# Altium PCB Copy yhh.PcbDoc
Units mm, origin at the board's own origin, x right, y up, seen from the top; angles counter-clockwise.
Board outline 100 x 100 mm, 2 copper layers (Top Layer, Bottom Layer), stack 1.571 mm thick; 42 components, 55 nets, 217 pads, 19 vias.
Unrouted connection lines stored in the file: 71.
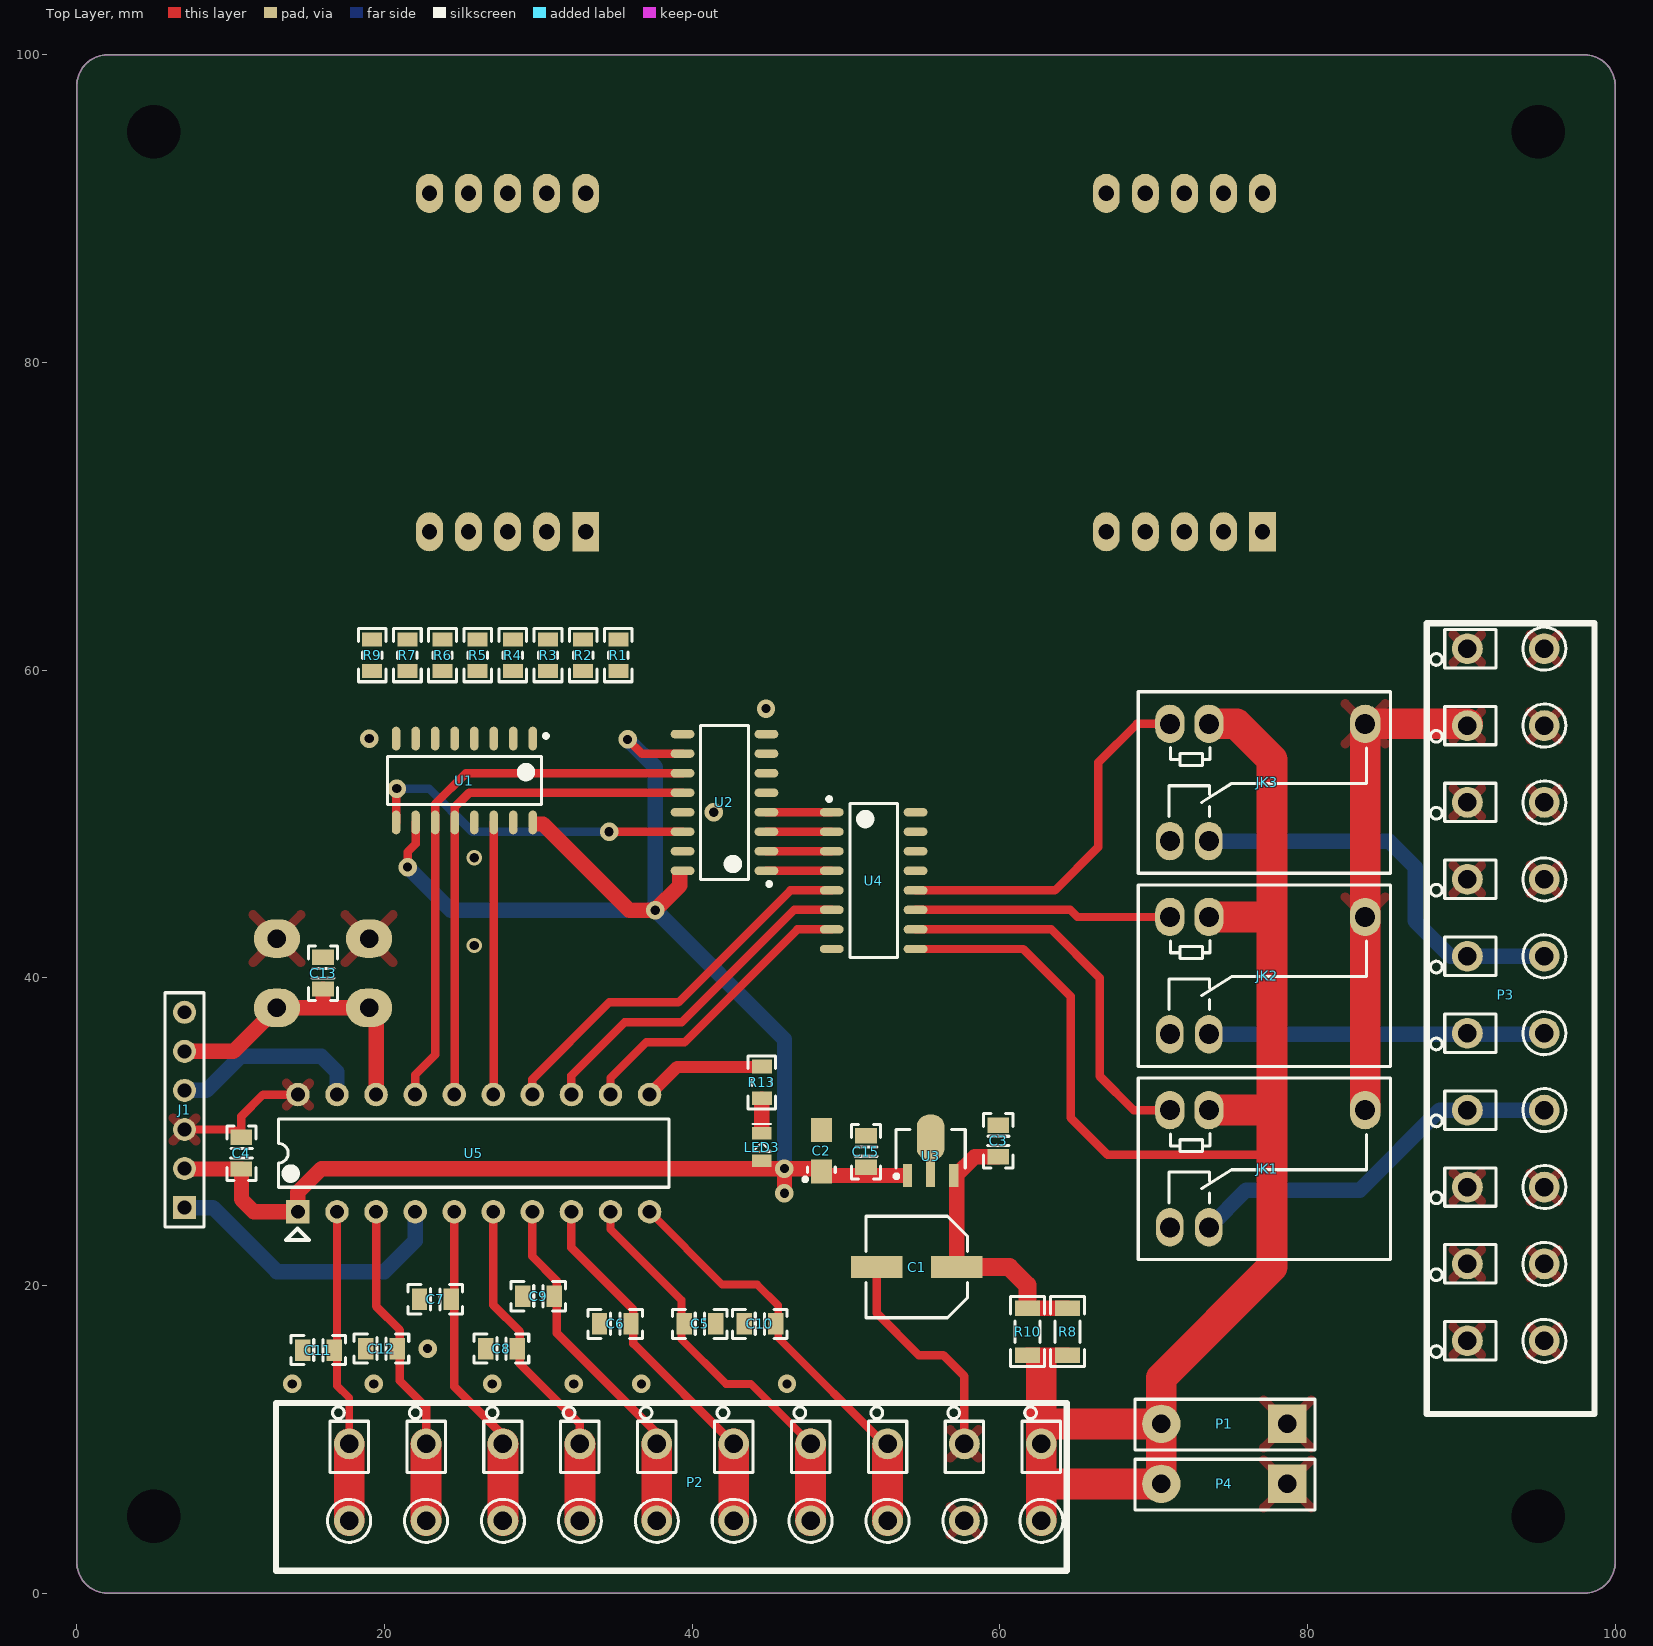
[diagram p0: Top Layer view]
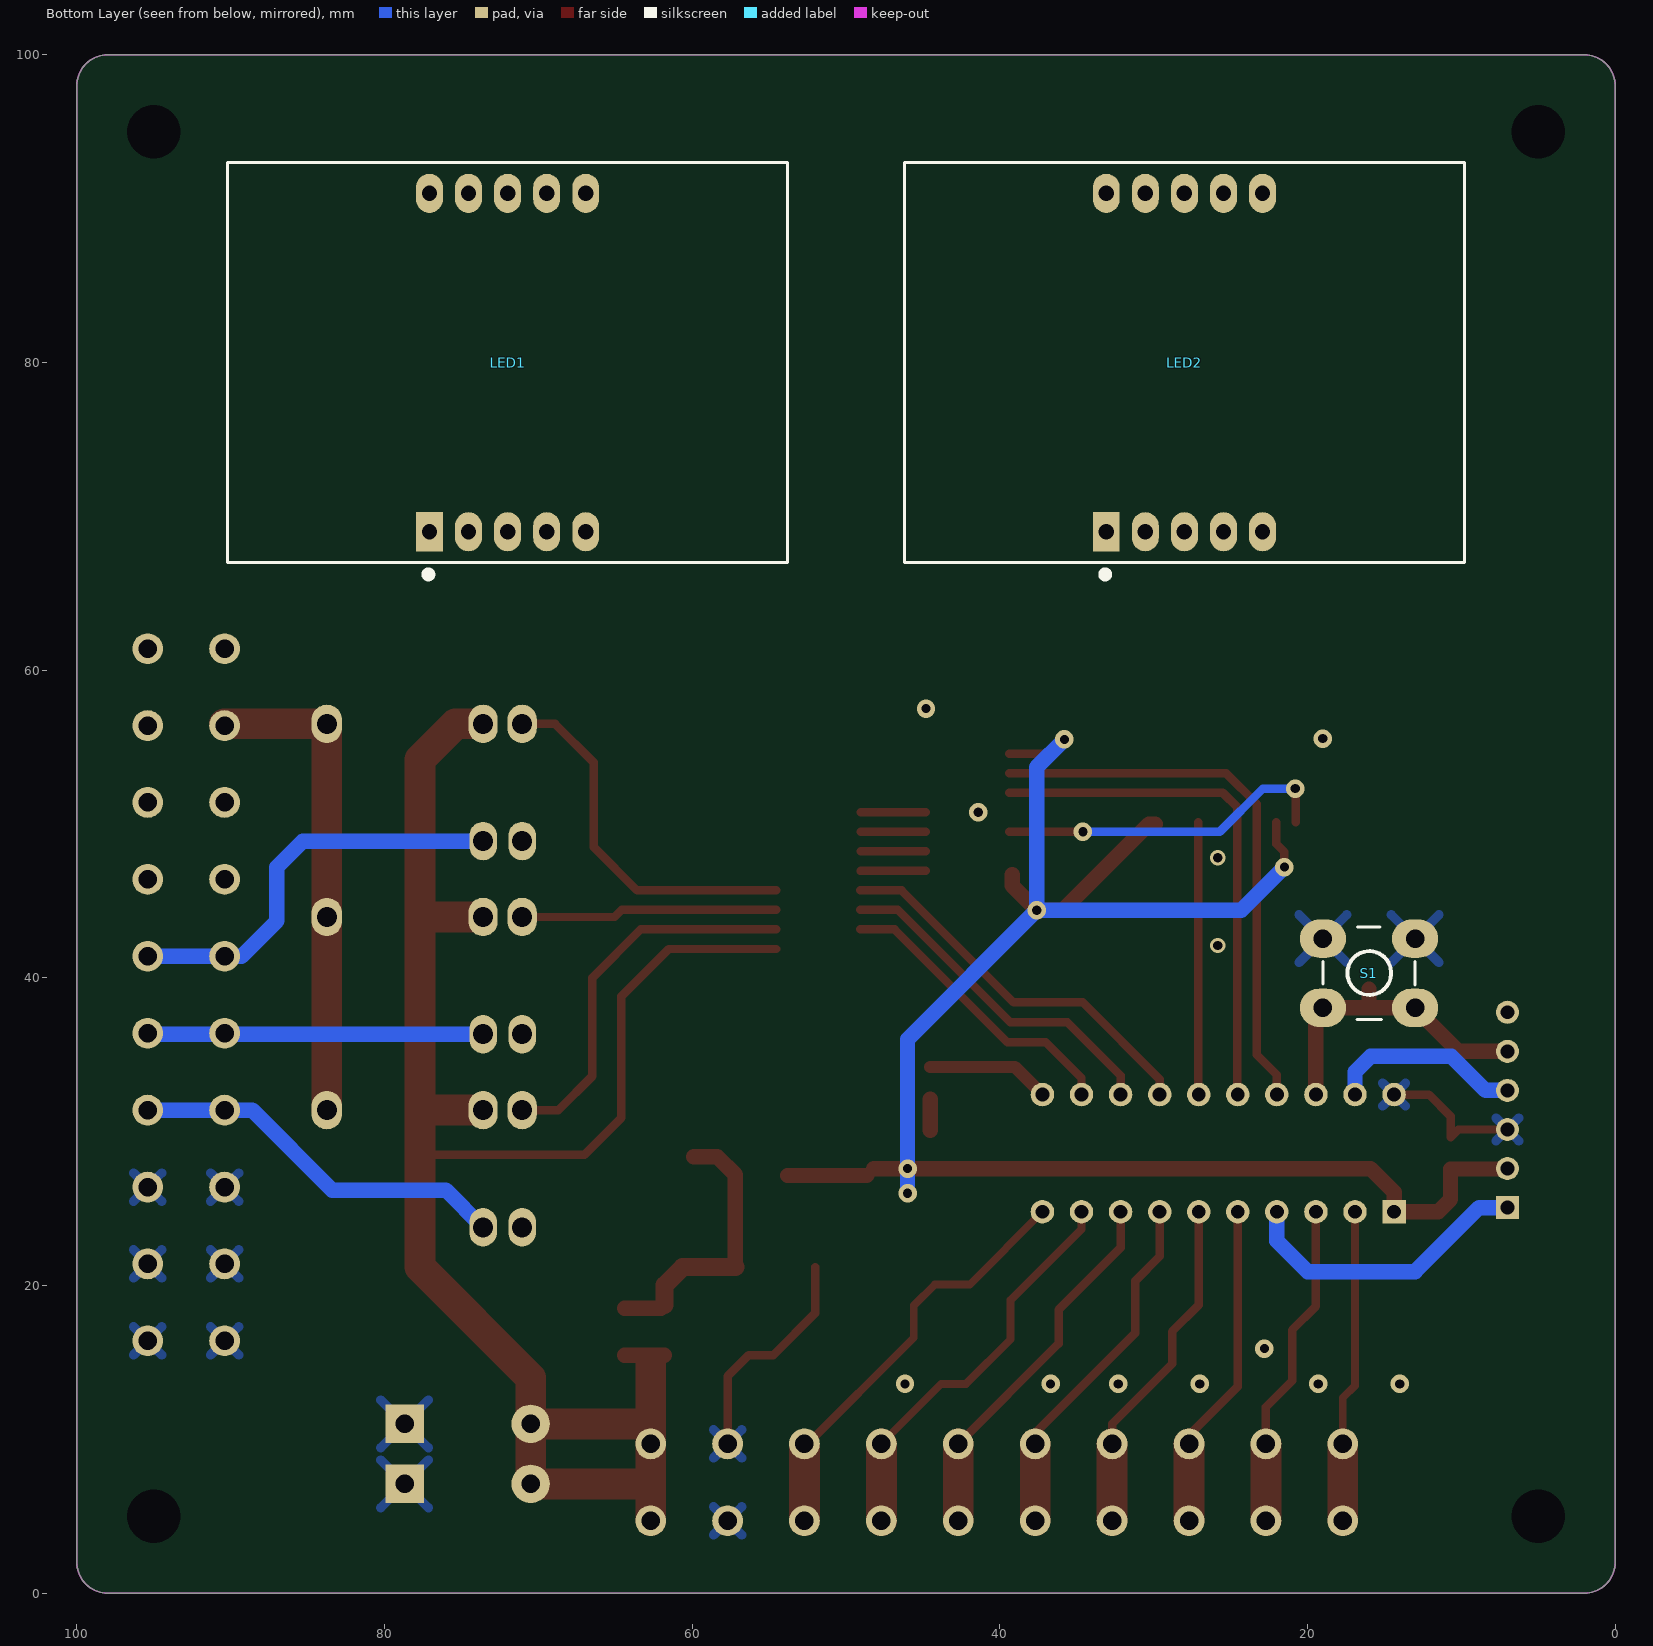
[diagram p1: Bottom Layer view, seen from below]

## Layer stack, top to bottom
Top Solder: solder mask 0.0102, Solder Resist, Dk 3.5
Top Layer: signal copper 0.0356
Dielectric 1: dielectric 1.5, FR-4, Dk 4.8
Bottom Layer: signal copper 0.0356
Bottom Solder: solder mask 0.0102, Solder Resist, Dk 3.5

## Board outline
0,2 0,98 cw(c2,98) 2,100 98,100 cw(c98,98) 100,98 100,2 cw(c98,2) 98,0 2,0 cw(c2,2)

## Design rules (kind name [scope] priority, off if disabled: settings)
Clearance Clearance_2 [IsKeepOut] p1: gap=2 ignorepadtopadclearanceinfootprint=FALSE
Clearance Clearance_1 [HasPad('Free-1')] p2: gap=5 ignorepadtopadclearanceinfootprint=FALSE
Clearance [All] p3: gap=0.6 ignorepadtopadclearanceinfootprint=FALSE
PlaneConnect [All] p1: planeconnectstyle=Relief reliefexpansion=0.5 reliefentries=4 reliefconductorwidth=0.5 reliefairgap=0.3
PolygonConnect [All] p1: thpad.connectstyle=Relief thpad.reliefconductorwidth=0.6 thpad.reliefentries=4 thpad.polygonreliefangle="45 Angle" thpad.airgapwidth=0.3 smdpad.connectstyle=Direct smdpad.reliefconductorwidth=0.5 smdpad.reliefentries=4 smdpad.polygonreliefangle="90 Angle" smdpad.airgapwidth=0.254 via.connectstyle=Direct via.reliefconductorwidth=0.254 via.reliefentries=4 via.polygonreliefangle="90 Angle" via.airgapwidth=0.254
RoutingVias [All] p1: holewidth=0.711 width=1.27 viastyle="Through Hole" minholewidth=0.711 minwidth=1.27 maxholewidth=0.711 maxwidth=1.27
SolderMaskExpansion [All] p1: expansion=0.102
Width [All] p1: maxlimit=5 minlimit=0.5 preferedwidth=0.55
29 further rules are at their usual default settings.

## Components (designator, comment, footprint, x,y, rotation, side; value= is the part's Value field where it differs from the comment)
C1 "Cap Pol" CAL6.3X8 54.6,21.2 r0 top value=100uF
C2 "Cap Pol" TA3216 48.4,28.748 r270 top value=100uF
C3 "0.1uF" C0805(2012) 59.9,29.4 r90 top
C4 "0.1uF" C0805(2012) 10.7,28.6 r90 top
C5 "0.1uF" C0805(2012) 40.5,17.5 r180 top
C6 "0.1uF" C0805(2012) 35,17.5 r180 top
C7 "0.1uF" C0805(2012) 23.3,19.1 r0 top
C8 "0.1uF" C0805(2012) 27.6,15.9 r0 top
C9 "0.1uF" C0805(2012) 30,19.3 r180 top
C10 "0.1uF" C0805(2012) 44.4,17.5 r0 top
C11 "0.1uF" C0805(2012) 15.7,15.8 r180 top
C12 "0.1uF" C0805(2012) 19.8,15.9 r0 top
C13 "0.1uF" C0805(2012) 16,40.3 r90 top
C15 "0.1uF" C0805(2012) 51.3,28.7 r90 top
J1 "ISP" HDR1X6 7,31.41 r90 top
JK1 "SRSZ" RELAY_SRSZ 77.4,27.59 r0 top
JK2 "SRSZ" RELAY_SRSZ 77.4,40.145 r0 top
JK3 "SRSZ" RELAY_SRSZ 77.4,52.7 r0 top
LED1 "Green" LED_KRS-8201CPG-3.5 72,80 r180 bottom
LED2 "Green" LED_KRS-8201CPG-3.5 28,80 r180 bottom
LED3 "LED" LED_0805 44.525,29 r270 top
P1 "Header 2" HDR1X2 74.7,11 r180 top
P2 "Header 10" CON_DEGSON236_5_10P 40.2,7.2 r180 top
P3 "Header 10" CON_DEGSON236_5_10P 92.9,38.9 r270 top
P4 "Header 2" HDR1X2 74.7,7.1 r180 top (schematic designator P1)
R1 "470" R0805(2012) 35.2,60.975 r90 top
R2 "470" R0805(2012) 32.914,60.975 r90 top
R3 "470" R0805(2012) 30.629,60.975 r90 top
R4 "470" R0805(2012) 28.343,60.975 r90 top
R5 "470" R0805(2012) 26.057,60.975 r90 top
R6 "470" R0805(2012) 23.771,60.975 r90 top
R7 "470" R0805(2012) 21.486,60.975 r90 top
R8 "330" R1206(3216) 64.4,17 r90 top
R9 "470" R0805(2012) 19.2,60.975 r90 top
R10 "330" R1206(3216) 61.8,17 r90 top
R13 "1K" R0805(2012) 44.525,33.2 r270 top
S1 "SW-PB4" KEY_6X6 16,40.3 r180 bottom
U1 "74HC595" SOP16 25.195,52.825 r180 top
U2 "74HC595" SOP16 42.1,51.4 r90 top
U3 "LM78L05" SOT89_3L 55.5,27.225 r270 top
U4 "ULN2003L" SOP16 51.8,46.32 r270 top
U5 "PIC16F690-I/P" DIP20 25.8,28.6 r0 top

## Footprints (in the part's own frame and the unit in brackets; to place one, negate y for a bottom-side part, rotate by r counter-clockwise, add the part's x,y. Pads: shape width x height; smd on the part's side, far side on the other; paste and mask are expansions set on the pad)
C0805(2012) [mm] "Chip Capacitor, 2-Leads, Body 2.00x1.25mm, IPC Medium Density"
  rect 1x1.4 smd: 1(-1.025,0) 2(1.025,0)
  silkscreen extent -1.78,-0.95 1.78,0.95
CAL6.3X8 [mm] "Aluminum Electrolytic Capacitor, Body 6.60x6.60x8.00mm, IPC High Density"
  rect 3.35x1.4 smd: 1(2.6,0) 2(-2.6,0)
  silkscreen extent -3.3,-3.3 3.3,3.3
CON_DEGSON236_5_10P [mm]
  round 2 hole 1.2 unplated: 1(-22.5,-2.5) 1(-22.5,2.5) 2(-17.5,-2.5) 2(-17.5,2.5) 3(-12.5,2.5) 3(-12.5,-2.5) 4(-7.5,-2.5) 4(-7.5,2.5) 5(-2.5,2.5) 5(-2.5,-2.5) 6(2.5,-2.5) 6(2.5,2.5) 7(7.5,2.5) 7(7.5,-2.5) 8(12.5,-2.5) 8(12.5,2.5) 9(17.5,2.5) 9(17.5,-2.5) 10(22.5,-2.5) 10(22.5,2.5)
  silkscreen extent -24.15,-5.15 27.25,5.75
DIP20 [mil]
  rect 60x60 hole 35.43: 1(-450,-150)
  round 60 hole 35.43: 2(-350,-150) 3(-250,-150) 4(-150,-150) 5(-50,-150) 6(50,-150) 7(150,-150) 8(250,-150) 9(350,-150) 10(450,-150) 11(450,150) 12(350,150) 13(250,150) 14(150,150) 15(50,150) 16(-50,150) 17(-150,150) 18(-250,150) 19(-350,150) 20(-450,150)
  silkscreen extent -500,-222 500,87
HDR1X2 [mm] "Connector; Header; 2 Position"
  rect 2.5x2.5 hole 1.2 paste+0: 1(-4,0)
  round 2.5 hole 1.2: 2(4.2,0)
  silkscreen extent -5.8,-1.6 5.9,1.7
HDR1X6 [mm] "Connector; Header; 6 Position"
  rect 1.5x1.5 hole 0.9: 1(-6.35,0)
  round 1.5 hole 0.9: 2(-3.81,0) 3(-1.27,0) 4(1.27,0) 5(3.81,0) 6(6.35,0)
  silkscreen extent -7.62,-1.27 7.62,1.27
KEY_6X6 [mm]
  oval 3x2.5 hole 1.2: 1(-3,-2.25) 1(3,-2.25) 2(-3,2.25) 2(3,2.25)
  silkscreen extent -3,-3 3,3
LED_0805 [mm]
  rect 0.8x1.25 smd: 1(0.9,0) 2(-0.9,0)
  silkscreen extent -1.5,-0.6 0.3,0.6
LED_KRS-8201CPG-3.5 [mm]
  rect 1.75x2.54 hole 1: 1(-5.08,-11)
  oval 1.75x2.54 hole 1: 2(-2.54,-11) 3(0,-11) 4(2.54,-11) 5(5.08,-11) 6(5.08,11) 7(2.54,11) 8(0,11) 9(-2.54,11) 10(-5.08,11)
  silkscreen extent -18.2,-13.97 18.2,13
R0805(2012) [mm] "Chip Resistor, 2-Leads, Body 2.00x1.25mm, IPC Medium Density"
  rect 0.9x1.3 smd: 1(-1.025,0) 2(1.025,0)
  silkscreen extent -1.72,-0.9 1.73,0.9
R1206(3216) [mm] "Chip Resistor, 2-Leads, Body 3.20x1.60mm, IPC Medium Density"
  rect 1x1.65 smd: 1(-1.525,0) 2(1.525,0)
  silkscreen extent -2.27,-1.1 2.27,1.1
RELAY_SRSZ [mm] "JK?"
  oval 1.9x2.5 hole 1.3: 1(-6.35,3.81) 2(-3.81,3.81)
  oval 2x2.5 hole 1.3: 3(6.35,3.81)
  oval 1.8x2.5 hole 1.3: 4(-3.81,-3.81) 5(-6.35,-3.81)
  silkscreen extent -8.4,-5.9 8,5.9
SOP16 [mm] "SOP, 16-Leads, Body 10.00x3.90mm, Pitch 1.27mm, IPC Medium Density"
  oval 0.55x1.55 smd: 1(-4.445,-2.725) 2(-3.175,-2.725) 3(-1.905,-2.725) 4(-0.635,-2.725) 5(0.635,-2.725) 6(1.905,-2.725) 7(3.175,-2.725) 8(4.445,-2.725) 9(4.445,2.725) 10(3.175,2.725) 11(1.905,2.725) 12(0.635,2.725) 13(-0.635,2.725) 14(-1.905,2.725) 15(-3.175,2.725) 16(-4.445,2.725)
  silkscreen extent -5.43,-3.02 5,1.55
SOT89_3L [mm] "SOT89, 3-Leads, Body 4.50x2.45mm, Pitch 1.50mm, Lead Span 3.5mm - Reverse Pinning, IPC Medium Density"
  rect 1.5x0.6 smd: 1(0.075,-1.5) 3(0.075,1.5)
  rrect90% 3x1.8 smd: 2(-2.4,0)
  rect 1.8x0.6 smd: 2(-0.075,0)
  silkscreen extent -2.93,-2.35 0.25,2.25
TA3216 [mm] "Molded Capacitor, 2-Leads, Body 3.20x1.60mm, IPC Medium Density"
  rect 1.55x1.35 smd: 1(1.35,0) 2(-1.35,0)
  silkscreen extent 1.05,-1.17 1.97,0.9

## Part data
C1 C2: "极性钽电容", LatestRevisionDate=17-Jul-2002, LatestRevisionNote="Re-released for DXP Platform.", PackageReference=RB7.6-15, Published=8-Jun-2000, Publisher="Altium Limited"
  C1: Vol=35V
  C2: Vol=16V
C3 C4 C5 C6 C7 C8 C9 C10 C11 C12 C13 C15: library part Cap, "无极性电容", LatestRevisionDate=17-Jul-2002, LatestRevisionNote="Re-released for DXP Platform.", Published=8-Jun-2000, Publisher="Altium Limited"
J1: library part ISP_5
JK1 JK2 JK3: library part RELAY_SRSZ, "单刀双掷继电器"
LED1 LED2: library part LED_KRS-8201CPG-3.5, "共阴1寸LED", dP段电压(10ｍA)=4V, dP段电压(14ｍA)=4V, 段电压(10ｍA)=7.7V, 段电压(14ｍA)=7.8
LED3: "发光二极管", LatestRevisionDate=08-Jul-2005, LatestRevisionNote="Mech Layer 1 removed.", PackageReference=LED-0, Published=8-Jun-2000, Publisher="Altium Limited"
P1 P4: "接插件", LatestRevisionDate=17-Jul-2002, LatestRevisionNote="Re-released for DXP Platform.", Publisher="Altium Limited"
P2 P3: "Header, 10-Pin", LatestRevisionDate=17-Jul-2002, LatestRevisionNote="Re-released for DXP Platform.", Publisher="Altium Limited"
R1 R2 R3 R4 R5 R6 R7 R8 R9 R10 R13: library part Res, "Resistor", LatestRevisionDate=17-Jul-2002, PackageDescription="Axial Device, Thru-Hole; 2 Leads; 0.7 in Pin Spacing", Published=8-Jun-2000, Publisher="Altium Limited"
S1: "微动开关", LatestRevisionDate=17-Jul-2002, LatestRevisionNote="Re-released for DXP Platform.", PackageReference=SPST-2, Published=24-Mar-1999, Publisher="Altium Limited"
U1 U2: "移位寄存器", ComponentAvailability="Not for New Design", ComponentLink1Description="Manufacturer Link", ComponentLink1URL=http://www.onsemi.com/, ComponentLink2Description=Datasheet, ComponentLink2URL=http://www.onsemi.com/pub/Collateral/MC74VHC595-D.PDF, DatasheetVersion=1997, LatestRevisionDate=13-Apr-2006, LatestRevisionNote="IPC-7351 Footprint Added.", PackageDescription="16-Pin Small Outline Package 1.27 mm Pitch", PackageReference=966-01, PackageVersion=1997, Published=15-Apr-2002, Publisher="Altium Limited"
U3: library part LM78LXX
U4: "驱动芯片", Code_IPC=SOIC127P600-16, Code_JEDEC=MS-012-AC, ComponentLink1Description="Manufacturer Link", ComponentLink1URL=http://www.allegromicro.com/, DatasheetVersion=1998, LatestRevisionDate=13-Apr-2006, LatestRevisionNote="IPC-7351 Footprint Added.", PackageDescription="16-Pin Small Outline Integrated Circuit 1.27 mm Pitch", PackageReference=L16, Published=13-Oct-2000, Publisher="Altium Limited"
U5: "Flash-Based, 8-Bit CMOS Microcontroller with nanoWatt Technology, 4K (x14-Bit words) Program Memory, 512 Bytes Data Memory, 18 I/O pins, 20-Pin PDIP, Standard VDD Range, Industrial Temperature", Supplier Part Number 1=PIC16F690-I/P-ND, ComponentLink1Description=Datasheet, ComponentLink1URL=http://ww1.microchip.com/downloads/en/DeviceDoc/41262E.pdf, ComponentLink2Description="Packaging Specification", ComponentLink2URL=http://www.microchip.com/stellent/groups/techpub_sg/documents/packagingspec/en012702.pdf, ComponentLink3Description="Microchip.com Home", ComponentLink3URL=http://www.microchip.com/, DatasheetVersion="revE, Mar-2008", PackageDescription="20-Lead Plastic Dual In-Line (P) - 300 mil Body [PDIP]", PackageReference=PDIP300-P20, PackageVersion="revBB, Aug-2009", Published=29-Jan-2009, Publisher="Altium Limited", Supplier 1=Digi-Key, Supplier 2=Farnell, Supplier 3=Farnell, Supplier Part Number 2=1103406, Supplier Part Number 3=1523800

## Free pads (board coordinates)
  round 0 hole 3.5 unplated: 1(5,5) 1(5,95) 1(95,5) 1(95,95)

## Via types
v1: diameter 1.2, hole 0.6, Top Layer to Bottom Layer, tented both sides, 17 vias
v2: diameter 1, hole 0.6, Top Layer to Bottom Layer, tented both sides, 2 vias

## Nets (pads, with @x,y where several pads share a name; then routed paths per layer and width w, separated by ;. In a path a pad name is that pad's centre, name@x,y a point inside that pad or via, vN(x,y) a via of type N, cw(c..) or ccw(c..) an arc to the next point about the centre after c; other vN are vias at no path point)
+5: C2.1 C4.1 C15.1 J1.2 LED3.1 U1.10 U1.16 U2.10 U2.16 U3.1 U5.1 | length 123.3
  Top Layer w0.55: v1(21.5,47.2) 21.5,48.18 22.02,48.7 U1.10 ; v1(35.8,55.5) 36.72,54.58 U2.10@39.375,54.58
  Top Layer w0.8: C2.1@48.198,27.6 C2.1
  Top Layer w1: J1.2@7.185,27.575 C4.1 10.7,25.6 11.51,24.79 U5.1 14.37,26.07 15.9,27.6 v1(46,27.6) ; U1.16@29.9,50 30.3,50 35.9,44.4 v1(37.6,44.4) 39.2,46 U2.16@39.2,46.7 ; v1(46,26) v1(46,27.6) ; C2.1@48.198,27.6 v1(46,27.6) ; C2.1@48.648,27.15 U3.1@53.8,27.15
  Bottom Layer w1: v1(21.5,47.2) 24.3,44.4 v1(37.6,44.4) ; v1(35.8,55.5) 37.6,53.7 v1(37.6,44.4) ; v1(46,26) v1(46,27.6) 46,36 v1(37.6,44.4)
+24: JK1.2 JK2.2 JK3.2 P1.2 P2.1 P4.2 R8.1 R10.1 U4.9 | length 124.8
  Top Layer w0.55: U4.9 61.525,41.875 64.6,38.8 64.6,30.9 67,28.5 77.7,28.5
  Top Layer w1: R10.1 R8.1
  Top Layer w2: P2.1@62.7,4.7 62.7,7.1 ; 62.7,14.9 62.7,11 ; JK1.2@73.7,31.4 77.7,31.4 ; JK2.2@73.7,43.955 77.655,43.955 77.7,44 ; JK3.2@73.7,56.51 75.39,56.51 77.7,54.2 77.7,44 ; 62.7,7.1 62.7,9.7 62.7,11 ; 62.7,7.1 P4.2 P1.2 ; 62.7,11 P1.2 ; P1.2 70.5,14 77.7,21.2 77.7,28.5 77.7,31.4 ; 77.7,31.4 77.7,44
+24_D: JK1.3 JK2.3 JK3.3 P3.1 P3.2 P3.3 P3.4 | length 32
  Top Layer w1.5: P3.2@90.4,56.4 P3.2@90.4,56.51 ; P3.2@95.29,56.51 P3.2@95.4,56.4
  Top Layer w2: JK1.3 JK2.3 JK3.3 P3.2@90.4,56.51
a: R1.1 U1.15
b: R2.1 U1.1
c: R3.1 U1.2
com1: LED1.10 U4.13
com2: LED1.5 U4.14
com3: LED2.10 U4.15
com4: LED2.5 U4.16
d: R4.1 U1.3
Down: C6.1 P2.5 U5.8 | length 24.5
  Top Layer w0.55: U5.8 32.15,22.45 36.175,18.425 36.175,16.225 P2.5@42.7,9.7
  Top Layer w2: P2.5@42.7,4.7 P2.5@42.7,9.7
dp: R9.1 U1.7
e: R5.1 U1.4
f: R6.1 U1.5
g: R7.1 U1.6
GND: C1.2 C2.2 C3.2 C4.2 C5.1 C6.2 C7.1 C8.1 C9.2 C10.1 C11.2 C12.1 C13.2 C15.2 J1.3 P1.1 P2.2 P3.8 P3.9 P3.10 P4.1 S1.2 U1.8 U1.13 U2.8 U2.13 U3.2 U4.8 U5.20 | length 24.4
  Top Layer w0.55: J1.3@7,29.93 7.21,30.14 10.185,30.14 C4.2 10.7,31 12.11,32.41 U5.20 ; C1.2 52,18.2 54.725,15.475 56.325,15.475 57.7,14.1 P2.2@57.7,9.7
  other v1: 14,13.6 19.3,13.6 27,13.6 32.3,13.6 36.7,13.6 46.166,13.6 22.8,15.9 41.4,50.765 19,55.55 44.8,57.5
  other v2: 25.83,42.1 25.83,47.8
Head: JK3.1 U4.12 | length 24.2
  Top Layer w0.55: U4.12 63.585,45.685 66.4,48.5 66.4,54 68.91,56.51 JK3.1
Head_O: JK3.4 P3.5 | length 27
  Bottom Layer w1: JK3.4 85.31,48.89 87,47.2 87,43.7 89.3,41.4 90.4,41.4 P3.5@95.4,41.4
Manual/Auto: C8.2 P2.7 U5.6 | length 22.4
  Top Layer w0.55: U5.6 27.07,18.73 28.8,17 28.8,14.9 32.7,11 P2.7@32.7,9.7
  Top Layer w2: P2.7@32.7,4.7 P2.7@32.7,9.7
"Motor starting": C10.2 P2.3 U5.10 | length 27.8
  Top Layer w0.5: U5.10 41.96,20.06 44.24,20.06 45.6,18.7 45.6,16.6 P2.3@52.7,9.5
  Top Layer w2: P2.3@52.7,4.7 P2.3@52.7,9.5
"Motor stop": C9.1 P2.6 U5.7 | length 22.7
  Top Layer w0.55: U5.7 29.61,21.89 31.2,20.3 31.2,16.9 P2.6@37.7,10.4
  Top Layer w2: P2.6@37.7,4.7 P2.6@37.7,9.7
NetC1_1: C1.1 C3.1 R8.2 R10.2 U3.3 | length 17.9
  Top Layer w1: C1.1 57.2,27.2 58.375,28.375 C3.1 ; R10.2@62.025,18.525 R8.2
  Top Layer w1.2: C1.1 60.6,21.2 61.8,20 R10.2@61.8,18.75
NetJ1_1: J1.1 U5.4 | length 19.4
  Bottom Layer w1: J1.1 8.84,25.06 13,20.9 20,20.9 21.99,22.89 U5.4
NetLED1_1: LED1.1 LED2.1 R4.2
NetLED1_2: LED1.2 LED2.2 R9.2
NetLED1_3: LED1.3 LED2.3 R5.2
NetLED1_4: LED1.4 LED2.4 R3.2
NetLED1_6: LED1.6 LED2.6 R2.2
NetLED1_7: LED1.7 LED2.7 R1.2
NetLED1_8: LED1.8 LED2.8 R6.2
NetLED1_9: LED1.9 LED2.9 R7.2
NetLED3_2: LED3.2 R13.2 | length 2
  Top Layer w1: LED3.2@44.525,30.1 R13.2@44.525,32.1
NetR13_1: R13.1 U5.11 | length 8
  Top Layer w0.8: U5.11 39.02,34.2 R13.1@44.525,34.2
NetU1_9: U1.9 U2.14 | length 22
  Top Layer w0.55: U1.9 20.75,52.25 v1(20.8,52.3) ; v1(34.6,49.5) 39.37,49.5 U2.14
  Bottom Layer w0.55: v1(20.8,52.3) 22.9,52.3 25.7,49.5 v1(34.6,49.5)
NetU1_11: U1.11 U2.11 U5.17 | length 36.3
  Top Layer w0.55: U5.17 21.99,33.69 23.29,34.99 U1.11 23.29,51.3 25.293,53.302 39.372,53.302 U2.11
NetU1_12: U1.12 U2.12 U5.16 | length 33.9
  Top Layer w0.55: U5.16 24.56,32.44 U1.12 24.56,51.085 25.51,52.035 U2.12
NetU1_14: U1.14 U5.15 | length 17.7
  Top Layer w0.55: U5.15 27.1,32.44 U1.14
NetU4_5: U4.5 U5.14 | length 25.5
  Top Layer w0.55: U5.14 29.61,33.41 34.6,38.4 39.1,38.4 46.385,45.685 U4.5
NetU4_6: U4.6 U5.13 | length 22.6
  Top Layer w0.55: U5.13 32.15,33.65 35.6,37.1 39.315,37.1 46.63,44.415 U4.6
NetU4_7: U4.7 U5.12 | length 19.5
  Top Layer w0.55: U5.12 34.69,33.49 37,35.8 39.5,35.8 46.845,43.145 U4.7
OK: C13.1 J1.5 S1.1 U5.18 | length 20.2
  Top Layer w1: J1.5 10.17,35.22 13,38.05 16,38.05 ; C13.1 16,38.05 ; U5.18 19.45,37.6 19,38.05 16,38.05
PGD: J1.4 U5.19 | length 12.5
  Bottom Layer w1: J1.4@7.21,32.68 8.42,32.68 10.64,34.9 15.9,34.9 16.91,33.89 U5.19
Q1: U2.1 U4.4 | length 4.3
  Top Layer w0.5: U4.4@49.055,46.955 U4.4@49.075,46.935
  Top Layer w0.55: U2.1 U4.4@49.055,46.955
Q2: U2.2 U4.3 | length 4.2
  Top Layer w0.55: U2.2 U4.3@49.055,48.225
Q3: U2.3 U4.2 | length 4.2
  Top Layer w0.55: U2.3 U4.2@49.055,49.495
Q4: U2.4 U4.1 | length 4.2
  Top Layer w0.55: U2.4 U4.1@49.055,50.765
Start-up: C11.1 P2.10 U5.2 | length 20.4
  Top Layer w0.5: U5.2 16.91,13.49 17.7,12.7 P2.10@17.7,9.7
  Top Layer w2: P2.10@17.7,4.7 P2.10@17.7,9.7
Start/Stop: JK2.1 U4.11 | length 16.7
  Top Layer w0.55: U4.11 64.585,44.415 65.045,43.955 JK2.1
Start/Stop_O: JK2.4 P3.6 | length 21.7
  Bottom Layer w1: JK2.4 P3.6@95.27,36.335
Stop: C12.2 P2.9 U5.3 | length 21.4
  Top Layer w0.55: U5.3 19.45,18.65 21,17.1 21,13.8 22.7,12.1 P2.9@22.7,9.7
  Top Layer w2: P2.9@22.7,4.7 P2.9@22.7,9.7
Up: C7.2 P2.8 U5.5 | length 21.4
  Top Layer w0.55: U5.5 24.53,13.43 27.7,10.26 P2.8@27.7,9.7
  Top Layer w2: P2.8@27.7,4.7 P2.8@27.7,9.7
Up/Down: JK1.1 U4.10 | length 25.1
  Top Layer w0.55: U4.10 63.355,43.145 66.5,40 66.5,33.6 68.7,31.4 JK1.1
Up/Down_O: JK1.4 P3.7 | length 25
  Bottom Layer w1: JK1.4 76.01,26.2 83.4,26.2 88.6,31.4 P3.7@95.4,31.4
"Urgent stop": C5.2 P2.4 U5.9 | length 26.4
  Top Layer w0.5: U5.9 34.69,23.664 39.3,19.054 39.3,16.5 42.2,13.6 43.8,13.6 P2.4@47.7,9.7
  Top Layer w2: P2.4@47.7,4.7 P2.4@47.7,9.7
pads on no net: J1.6 JK1.5 JK2.5 JK3.5 U2.5 U2.6 U2.7 U2.9 U2.15

## Polygon pours and split planes (outlines as drawn)
GND on Top Layer "GND_L01_P004" (none, remove dead copper, pour order 4): 0.7,98.9 0.7,1.2 99,1.2 99,98.9
+24_D on Top Layer "+24_D_L01_P000" (none, remove dead copper, pour order 0): 82.2,63.3 82.2,44.2 98.7,44.2 98.7,63.3
GND on Bottom Layer "GND_L02_P002" (none, remove dead copper, pour order 2): 0.7,98.9 0.7,1.2 99,1.2 99,98.9

## Keep-outs
Keep-Out Layer:
  the board outline again, w0.1

## Other copper
Top Layer:
  pour cut-out: 68.4,20.9 81.4,20.9 81.4,60.9 68.4,60.9

## Dimensions
0,2 to 100,2 on Mechanical 1
2,0 to 2,100 on Mechanical 1